# Altium PCB Tigershark 3D R1.1.PcbDoc (part 2 of 3)
Units mil, origin at the board's own origin, x right, y up, seen from the top; angles counter-clockwise.
Board outline 6000 x 4500 mil, 4 copper layers (Top Layer, Groun Plane, Power Plane, Bottom Layer); 257 components, 247 nets, 1024 pads, 791 vias.
Unrouted connection lines stored in the file: 159.
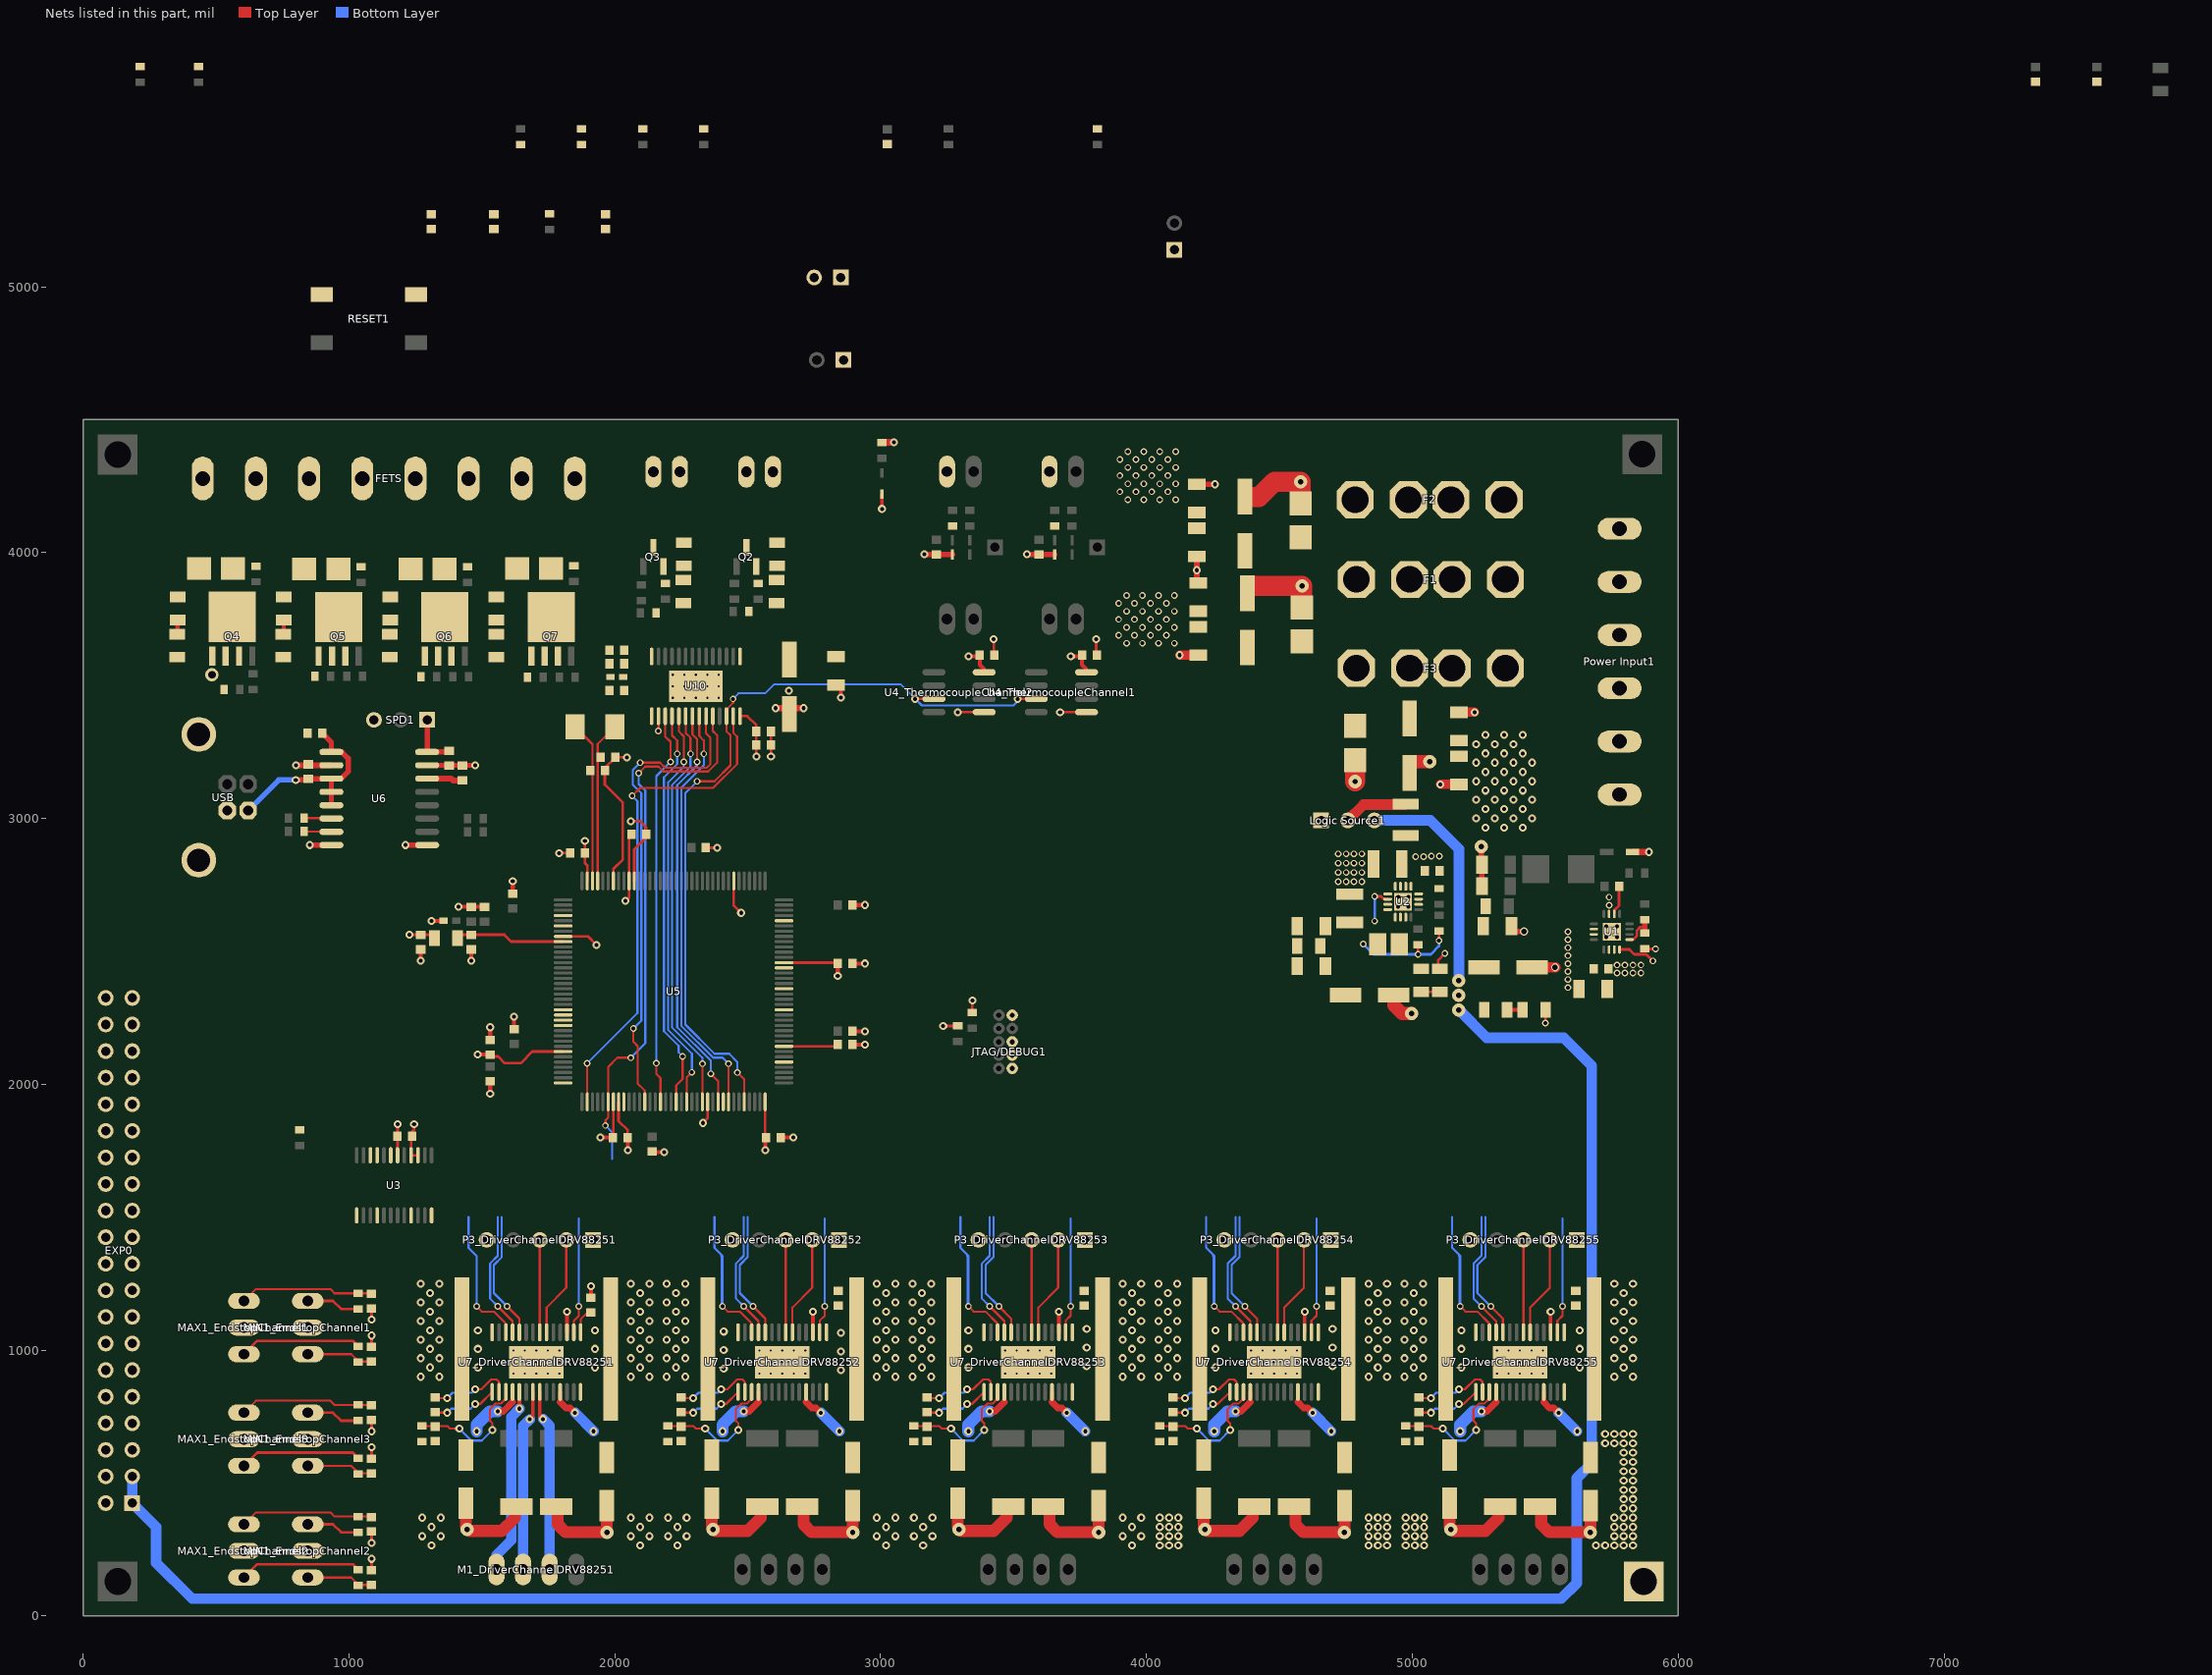
[diagram p4: the nets of this part, all layers, seen from the top]

## Via types
v1: diameter 30, hole 15, Top Layer to Bottom Layer, 501 vias
v2: diameter 25, hole 15, Top Layer to Bottom Layer, 177 vias
v3: diameter 19.68, hole 7.87, Top Layer to Bottom Layer, 90 vias
v4: diameter 50, hole 20, Top Layer to Bottom Layer, 19 vias
v5: diameter 30, hole 20, Top Layer to Bottom Layer, 3 vias
v6: diameter 50, hole 28, Top Layer to Bottom Layer, 1 vias

## Nets (pads, with @x,y where several pads share a name; then routed paths per layer and width w, separated by ;. In a path a pad name is that pad's centre, name@x,y a point inside that pad or via, vN(x,y) a via of type N, cw(c..) or ccw(c..) an arc to the next point about the centre after c; other vN are vias at no path point)
3.3VCC: C13.2 C23.1 C25.2 C26.1 C31_ThermocoupleChannel1.2 C31_ThermocoupleChannel2.2 C35.1 C45.2 C46.2 C47.2 C48.2 C49.2 C50.2 C51.2 C60.2 C61.2 C62.2 C64.2 DBGEN1.1 EXP0.5 EXP0.7 FB3.2 FB5.1 FB9.1 JTAG/DEBUG1.1@3495,2060 MAX1_EndstopChannel1.3 MAX1_EndstopChannel2.3 MAX1_EndstopChannel3.3 MIN1_EndstopChannel1.3 MIN1_EndstopChannel2.3 MIN1_EndstopChannel3.3 P3_DriverChannelDRV88251.1 P3_DriverChannelDRV88252.1 P3_DriverChannelDRV88253.1 P3_DriverChannelDRV88254.1 P3_DriverChannelDRV88255.1 R2_EndstopChannel1.1 R2_EndstopChannel2.1 R2_EndstopChannel3.1 R3_EndstopChannel1.1 R3_EndstopChannel2.1 R3_EndstopChannel3.1 R11.2 R13_ThermistorChannel1.2 R13_ThermistorChannel2.2 R21.2 R24.2 R25.2 R26.2 R27.2 TRST1.1 U3.6 U4_ThermocoupleChannel1.4 U4_ThermocoupleChannel2.4 U5.30 U5.43 U5.72 U5.80 U5.96 U5.134 U5.143 U7_DriverChannelDRV88251.17 U7_DriverChannelDRV88252.17 U7_DriverChannelDRV88253.17 U7_DriverChannelDRV88254.17 U7_DriverChannelDRV88255.17 U10.28 | length 4756.6
  Top Layer w10: MAX1_EndstopChannel2.3@605,145 655,195 1014.05,195 R2_EndstopChannel2.1@1035,174.05 ; MAX1_EndstopChannel3.3@605,565 655,615 1014.05,615 R2_EndstopChannel3.1@1035,594.05 ; MAX1_EndstopChannel1.3@605,985 655,1035 1014.05,1035 R2_EndstopChannel1.1@1035,1014.05 ; MIN1_EndstopChannel2.3@845,345 940,345 970,315 R3_EndstopChannel2.1@1035,315 ; MIN1_EndstopChannel3.3@845,765 940,765 970,735 R3_EndstopChannel3.1@1035,735 ; MIN1_EndstopChannel1.3@845,1185 940,1185 970,1155 R3_EndstopChannel1.1@1035,1155 ; U3.6@1182.8,1733.19 v1(1182.8,1850) ; v1(1227.56,2562.56) C64.2@1270,2562.56 1309.13,2562.56 FB9.1@1321.69,2550 ; C45.2@1526.1,2104.65 1561.1,2104.65 1586.1,2079.65 1646.1,2079.65 1689.72,2123.27 U5.30@1805.75,2123.27 ; v1(1887.56,2915) 1887.56,2832.44 1896.3,2823.7 U5.143@1896.3,2765 ; C48.2@1994.72,1799.65 U5.43@1994.72,1934.29 ; v1(2060,2990) 2095,2990 2117.56,2967.44 C51.2@2117.56,2940 2117.56,2927.56 2073.46,2883.46 U5.134@2073.46,2765 ; U10.28@2471.18,3385 2498.11,3385 2532.28,3350.83 v1(2532.28,3233.27) ; C50.2@2565.59,1799.65 U5.72@2565.59,1934.29 ; U5.80@2636.46,2142.95 2831.85,2142.95 C47.2@2838.54,2149.65 ; U5.96@2636.46,2457.91 C46.2@2831.85,2457.91 ; v1(3235.47,2219.53) R26.2@3290,2219.53 ; R27.2@3345,2269.53 v1(3345,2315)
  Top Layer w14: U7_DriverChannelDRV88251.17@1820,1067.36 v1(1820,1145) ; U7_DriverChannelDRV88252.17@2745,1067.36 v1(2745,1145) ; U7_DriverChannelDRV88253.17@3670,1067.36 v1(3670,1145) ; U7_DriverChannelDRV88254.17@4595,1067.36 v1(4595,1145) ; U7_DriverChannelDRV88255.17@5520,1067.36 v1(5520,1145)
  Top Layer w15: v1(1310,2615) FB5.1@1356.38,2615 ; v1(1483.54,2112.09) C45.2@1531.1,2112.09 ; v1(1945.98,1799.65) C48.2@1993.54,1799.65 ; v1(2565.59,1752.09) C50.2@2565.59,1799.65 ; v1(2838.54,2407.09) C46.2@2838.54,2454.65 ; v1(3330.51,3610) 3372.95,3610 3372.95,3577.56 3389.49,3561.02 U4_ThermocoupleChannel2.4@3389.49,3550 ; v1(3715.51,3610) 3757.95,3610 3757.95,3577.56 3774.49,3561.02 U4_ThermocoupleChannel1.4@3774.49,3550
+5VCC: "Logic Source1.3" C9.1 C34.1 EXP0.1 EXP0.3 FB2.2 R8.2 | length 9199.9
  Bottom Layer w40: EXP0.3@185,525 EXP0.1@185,425 275,335 275,200 410,65 5560,65 5619,124 5619,519 5675,575 5675,2070 5570,2175 5280,2175 v4(5175,2280) ; 4857.45,2992.55 5067.45,2992.55 5175,2885 v4(5175,2390)
  other v4: 5175,2335
+12VCC1: C10.2 C11.2 C16.1 C18.2 C19.2 C66_DriverChannelDRV88251.1 C66_DriverChannelDRV88252.1 C66_DriverChannelDRV88253.1 C66_DriverChannelDRV88254.1 C66_DriverChannelDRV88255.1 C69_DriverChannelDRV88251.1 C69_DriverChannelDRV88252.1 C69_DriverChannelDRV88253.1 C69_DriverChannelDRV88254.1 C69_DriverChannelDRV88255.1 C70_DriverChannelDRV88251.1 C70_DriverChannelDRV88252.1 C70_DriverChannelDRV88253.1 C70_DriverChannelDRV88254.1 C70_DriverChannelDRV88255.1 D8.2 F3.2 R30_DriverChannelDRV88251.1 R30_DriverChannelDRV88252.1 R30_DriverChannelDRV88253.1 R30_DriverChannelDRV88254.1 R30_DriverChannelDRV88255.1 R31.2 U1.2 U1.3 U1.11 U7_DriverChannelDRV88251.4 U7_DriverChannelDRV88251.11 U7_DriverChannelDRV88252.4 U7_DriverChannelDRV88252.11 U7_DriverChannelDRV88253.4 U7_DriverChannelDRV88253.11 U7_DriverChannelDRV88254.4 U7_DriverChannelDRV88254.11 U7_DriverChannelDRV88255.4 U7_DriverChannelDRV88255.11 | length 2214.5
  Top Layer w14: 1615.43,804.43 U7_DriverChannelDRV88251.4@1615.43,842.8 ; 1794.57,804.43 U7_DriverChannelDRV88251.11@1794.57,842.8 ; 2540.43,804.43 U7_DriverChannelDRV88252.4@2540.43,842.8 ; 2719.57,804.43 U7_DriverChannelDRV88252.11@2719.57,842.8 ; 3465.43,804.43 U7_DriverChannelDRV88253.4@3465.43,842.8 ; 3644.57,804.43 U7_DriverChannelDRV88253.11@3644.57,842.8 ; 4390.43,804.43 U7_DriverChannelDRV88254.4@4390.43,842.8 ; 4569.57,804.43 U7_DriverChannelDRV88254.11@4569.57,842.8 ; 5315.43,804.43 U7_DriverChannelDRV88255.4@5315.43,842.8 ; 5494.57,804.43 U7_DriverChannelDRV88255.11@5494.57,842.8
  Top Layer w25: v1(1560,770) 1581,770 1615.43,804.43 ; 1794.57,804.43 1816,783 1832,783 v1(1850,765) ; v1(2485,770) 2506,770 2540.43,804.43 ; 2719.57,804.43 2741,783 2757,783 v1(2775,765) ; v1(3410,770) 3431,770 3465.43,804.43 ; 3644.57,804.43 3666,783 3682,783 v1(3700,765) ; v1(4335,770) 4356,770 4390.43,804.43 ; 4569.57,804.43 4591,783 4607,783 v1(4625,765) ; v1(5260,770) 5281,770 5315.43,804.43 ; 5494.57,804.43 5516,783 5532,783 v1(5550,765)
  Bottom Layer w39: v1(1850,765) v1(1920,695) ; v1(2775,765) v1(2845,695) ; v1(3700,765) v1(3770,695) ; v1(4625,765) v1(4695,695) ; v1(5550,765) v1(5620,695)
  Bottom Layer w45: v1(1480,695) 1480,720 1530,770 v1(1560,770) ; v1(2405,695) 2405,720 2455,770 v1(2485,770) ; v1(3330,695) 3330,720 3380,770 v1(3410,770) ; v1(4255,695) 4255,720 4305,770 v1(4335,770) ; v1(5180,695) 5180,720 5230,770 v1(5260,770)
  other v1: 1310,265 2095,265 2235,265 3020,265 3160,265 3945,265 4050,265 4085,265 4120,265 4835,265 4870,265 4905,265 4975,265 5010,265 5045,265 5690,265 5725,265 5760,265 5795,265 5830,265 1275,300 1345,300 2060,300 2130,300 2200,300 2270,300 2985,300 3055,300 3125,300 3195,300 3910,300 3980,300 4050,300 4085,300 4120,300 4835,300 4870,300 4905,300 4975,300 5010,300 5045,300 5760,300 5795,300 5830,300 1310,335 2095,335 2235,335 3020,335 3160,335 3945,335 4050,335 4085,335 4120,335 4835,335 4870,335 4905,335 4975,335 5010,335 5045,335 5760,335 5795,335 5830,335 1275,370 1345,370 2060,370 2130,370 2200,370 2270,370 2985,370 3055,370 3125,370 3195,370 3910,370 3980,370 4050,370 4085,370 4120,370 4835,370 4870,370 4905,370 4975,370 5010,370 5045,370 5760,370 5795,370 5830,370 5795,405 5830,405 5795,440 5830,440 5795,475 5830,475 5795,510 5830,510 5795,545 5830,545 5795,580 5830,580 5795,615 5830,615 5725,650 5760,650 5795,650 5830,650 5725,685 5760,685 5795,685 5830,685 5275,2965 5345,2965 5415,2965 5240,3000 5310,3000 5380,3000 5450,3000 5275,3035 5345,3035 5415,3035 5240,3070 5310,3070 5380,3070 5450,3070 5275,3105 5345,3105 5415,3105 5240,3140 5310,3140 5380,3140 5450,3140 5275,3175 5345,3175 5415,3175 5240,3210 5310,3210 5380,3210 5450,3210 5275,3245 5345,3245 5415,3245 5240,3280 5310,3280 5380,3280 5275,3315 5345,3315 5415,3315
  other v2: 5770,2419 5800,2419 5830,2419 5860,2419 5770,2449 5800,2449 5830,2449 5860,2449 5740.16,2674 5740,2704
+12VCC2: C3.1 C5.2 C6.2 C27.2 C28.1 D4.2 D15.2 D17.2 D19.2 F2.2 FAN-1.1 FAN-2.1 FETS.3 FETS.5 FETS.7 R1.2 R13.1 R47.1 R60.2 R64.2 R68.2 U10.1 | length 45.2
  Top Layer w8: R1.2@3005,4414.53 R1.2@3005.47,4415
  Top Layer w25: R1.2@3005.47,4415 v1(3050,4415)
  other v2: 3930,4199 3990,4199 4050,4199 4110,4199 3900,4229 3960,4229 4020,4229 4080,4229 3930,4259 3990,4259 4050,4259 4110,4259 3900,4290 3960,4290 4020,4290 4080,4290 3930,4320 3990,4320 4050,4320 4110,4320 3900,4350 3960,4350 4020,4350 4080,4350 3930,4380 3990,4380 4050,4380 4110,4380
+12VCC3: C12.1 C14.2 C15.2 D6.2 D12.2 F1.2 FETS.1 R56.2
  other v2: 3925,3659 3985,3659 4045,3659 4105,3659 3895,3689 3955,3689 4015,3689 4075,3689 3925,3719 3985,3719 4045,3719 4105,3719 3895,3749 3955,3749 4015,3749 4075,3749 3925,3779 3985,3779 4045,3779 4105,3779 3895,3809 3955,3809 4015,3809 4075,3809 3925,3839 3985,3839 4045,3839 4105,3839
ADC_TRIGGER: U5.36
ATSAM_SS: U5.64
AVREF: C65.2 FB9.2 U5.9 | length 413.4
  Top Layer w8: FB9.2@1408.31,2550 FB9.2@1420.87,2562.56
  Top Layer w10: FB9.2@1420.87,2562.56 C65.2@1460,2562.56 1584.45,2562.56 1610.35,2536.65 U5.9@1805.75,2536.65
BED_PWM: U5.52 U10.17 | length 1487.9
  Top Layer w8: v2(2156.1,2079.65) 2156.1,2039.65 2171.89,2023.86 U5.52@2171.89,1934.29 ; U10.17@2189.68,3385 2189.68,3308.43 2209.84,3288.27 v2(2209.84,3213.27)
  Bottom Layer w8: v2(2156.1,2079.65) 2156.1,3159.53 v2(2209.84,3213.27)
BST: C7.2 U1.10 | length 110.4
  Top Layer w10: U1.10@5759.84,2640.93 5759.84,2654.59 5777.56,2672.3 C7.2@5777.56,2744
DIR1: P3_DriverChannelDRV88251.2 U7_DriverChannelDRV88251.20 | length 378.7
  Top Layer w8: U7_DriverChannelDRV88251.20@1743.39,1067.2 1743.39,1160.89 1817.5,1235 1817.5,1414.5 P3_DriverChannelDRV88251.2@1818,1415
DIR2: P3_DriverChannelDRV88252.2 U7_DriverChannelDRV88252.20 | length 378.7
  Top Layer w8: U7_DriverChannelDRV88252.20@2668.39,1067.2 2668.39,1160.89 2742.5,1235 2742.5,1414.5 P3_DriverChannelDRV88252.2@2743,1415
DIR3: P3_DriverChannelDRV88253.2 U7_DriverChannelDRV88253.20 | length 378.7
  Top Layer w8: U7_DriverChannelDRV88253.20@3593.39,1067.2 3593.39,1160.89 3667.5,1235 3667.5,1414.5 P3_DriverChannelDRV88253.2@3668,1415
DIR4: P3_DriverChannelDRV88254.2 U7_DriverChannelDRV88254.20 | length 378.7
  Top Layer w8: U7_DriverChannelDRV88254.20@4518.39,1067.2 4518.39,1160.89 4592.5,1235 4592.5,1414.5 P3_DriverChannelDRV88254.2@4593,1415
DIR5: P3_DriverChannelDRV88255.2 U7_DriverChannelDRV88255.20 | length 378.7
  Top Layer w8: U7_DriverChannelDRV88255.20@5443.39,1067.2 5443.39,1160.89 5517.5,1235 5517.5,1414.5 P3_DriverChannelDRV88255.2@5518,1415
DM_N: R18.1 U6.6 | length 101.4
  Top Layer w10: R18.1@831.53,3001 U6.6@932.88,3001
DP_P: R20.1 U6.7 | length 101.4
  Top Layer w8: R20.1@831.53,2951 U6.7@932.88,2951
DRV_RESET1: U7_DriverChannelDRV88251.16 | length 435.8
  Top Layer w8: U7_DriverChannelDRV88251.16@1845.75,1067.2 1845.75,1110.75 1865,1130 v2(1865,1165)
  Bottom Layer w8: v2(1865,1165) 1865,1495
DRV_RESET2: U7_DriverChannelDRV88252.16 | length 435.8
  Top Layer w8: U7_DriverChannelDRV88252.16@2770.75,1067.2 2770.75,1110.75 2790,1130 v2(2790,1165)
  Bottom Layer w8: v2(2790,1165) 2790,1495
DRV_RESET3: U7_DriverChannelDRV88253.16 | length 640.8
  Top Layer w8: U7_DriverChannelDRV88253.16@3695.75,1067.2 3695.75,1110.75 3715,1130 v2(3715,1165)
  Bottom Layer w8: 3715,1370 v2(3715,1165) 3715,1495
DRV_RESET4: U7_DriverChannelDRV88254.16 | length 435.8
  Top Layer w8: U7_DriverChannelDRV88254.16@4620.75,1067.2 4620.75,1110.75 4640,1130 v2(4640,1165)
  Bottom Layer w8: v2(4640,1165) 4640,1495
DRV_RESET5: U7_DriverChannelDRV88255.16 | length 435.8
  Top Layer w8: U7_DriverChannelDRV88255.16@5545.75,1067.2 5545.75,1110.75 5565,1130 v2(5565,1165)
  Bottom Layer w8: v2(5565,1165) 5565,1495
EN1: P3_DriverChannelDRV88251.3 U7_DriverChannelDRV88251.21 | length 347.9
  Top Layer w8: U7_DriverChannelDRV88251.21@1717.8,1067.2 1718,1067.41 P3_DriverChannelDRV88251.3@1718,1415
EN2: P3_DriverChannelDRV88252.3 U7_DriverChannelDRV88252.21 | length 347.9
  Top Layer w8: U7_DriverChannelDRV88252.21@2642.8,1067.2 2643,1067.41 P3_DriverChannelDRV88252.3@2643,1415
EN3: P3_DriverChannelDRV88253.3 U7_DriverChannelDRV88253.21 | length 347.9
  Top Layer w8: U7_DriverChannelDRV88253.21@3567.8,1067.2 3568,1067.41 P3_DriverChannelDRV88253.3@3568,1415
EN4: P3_DriverChannelDRV88254.3 U7_DriverChannelDRV88254.21 | length 347.9
  Top Layer w8: U7_DriverChannelDRV88254.21@4492.8,1067.2 4493,1067.41 P3_DriverChannelDRV88254.3@4493,1415
EN5: P3_DriverChannelDRV88255.3 U7_DriverChannelDRV88255.21 | length 347.9
  Top Layer w8: U7_DriverChannelDRV88255.21@5417.8,1067.2 5418,1067.41 P3_DriverChannelDRV88255.3@5418,1415
ERASE: U5.87
EXP_CS: U5.45
FB: R7.1 R10.2 U1.5 | length 134.9
  Top Layer w10: U1.5@5816.93,2544.47 5830.59,2544.47 5845,2558.89 5845,2579 5857.74,2591.74 5875,2591.74
  Top Layer w20: R10.2@5875,2569 R7.1@5875,2614.47
FET_CS: U5.49 U10.23 | length 1796.4
  Top Layer w8: v2(2070,2210) 2070,2160 2086.1,2143.9 2086.1,2002.68 2112.83,1975.94 U5.49@2112.83,1934.29 ; v2(2095,3210) 2170,3210 2189.23,3190.77 2345.77,3190.77 2359.84,3204.84 2359.84,3303.27 2343.23,3319.88 U10.23@2343.23,3385
  Bottom Layer w8: v2(2070,2210) 2100,2240 2100,3095 2067.5,3127.5 2067.5,3182.5 v2(2095,3210)
FET_PWM1: U5.65 U10.22 | length 1587.4
  Top Layer w8: U10.22@2317.64,3385 2317.64,3310.47 2334.84,3293.27 v2(2334.84,3243.27) ; U5.65@2427.8,1934.29 v2(2427.8,2077.95)
  Bottom Layer w8: v2(2334.84,3243.27) 2334.84,3199.84 2250,3115 2250,2220.2 2370.2,2100 2405.75,2100 v2(2427.8,2077.95)
FET_PWM2: U5.63 U10.21 | length 1552.6
  Top Layer w8: U10.21@2292.05,3385 2292.05,3316.26 2309.84,3298.47 v2(2309.84,3213.27) ; v2(2361.1,2039.65) 2388.43,2012.32 U5.63@2388.43,1934.29
  Bottom Layer w8: v2(2309.84,3213.27) 2309.84,3199.84 2235,3125 2235,2215 2361.1,2088.9 v2(2361.1,2039.65)
FET_PWM3: U5.60 U10.20 | length 1534.6
  Top Layer w8: U10.20@2266.46,3385 2266.46,3322.06 2284.84,3303.67 v2(2284.84,3243.27) ; U5.60@2329.37,1934.29 v2(2329.37,2077.91)
  Bottom Layer w8: v2(2284.84,3243.27) 2284.84,3195.32 2215,3125.47 2215,2215 2329.37,2100.63 v2(2329.37,2077.91)
FET_PWM4: U5.57 U10.19 | length 1528
  Top Layer w8: U10.19@2240.87,3385 2240.87,3327.85 2259.84,3308.87 v2(2259.84,3213.27) ; U5.57@2270.31,1934.29 2270.31,2025.31 v2(2290,2045)
  Bottom Layer w8: v2(2259.84,3213.27) 2259.84,3194.84 2201,3136 2201,2204 2290,2115 v2(2290,2045)
FET_PWM5: U5.55 U10.18 | length 1518.4
  Top Layer w8: U10.18@2215.28,3385 2215.28,3312.83 2234.84,3293.27 v2(2234.84,3243.27) ; U5.55@2230.94,1934.29 2230.94,1995.94 2255,2020 v2(2255,2105)
  Bottom Layer w8: v2(2234.84,3243.27) 2234.84,3204.84 2185,3155 2185,2200 2240,2145 2240,2120 v2(2255,2105)
FET_RESET: U5.38 U10.27 | length 1867.6
  Top Layer w8: U5.38@1896.3,1934.29 v2(1896.3,2079.45) ; v2(2065,3085) 2095,3115 2369.8,3115 2459.84,3205.04 2459.84,3308.27 2445.59,3322.52 U10.27@2445.59,3385
  Bottom Layer w8: v2(1896.3,2079.45) 2085,2268.15 2085,3065 v2(2065,3085)
GND: "Power Input1.2" "Power Input1.4" "Power Input1.6" C1_EndstopChannel1.2 C1_EndstopChannel2.2 C1_EndstopChannel3.2 C2_EndstopChannel1.2 C2_EndstopChannel2.2 C2_EndstopChannel3.2 C3.2 C4.2 C5.1 C6.1 C8.1 C9.2 C10.1 C11.1 C12.2 C13.1 C14.1 C15.1 C16.2 C17.2 C18.1 C19.1 C20.1 C21.1 C22.2 C23.2 C24.1 C25.1 C26.2 C27.1 C28.2 C29.2 C30_ThermistorChannel1.1 C30_ThermistorChannel2.1 C31_ThermocoupleChannel1.1 C31_ThermocoupleChannel2.1 C32.1 C33.1 C34.2 C35.2 C36.1 C37.1 C38.1 C39.1 C40.1 C41.1 C42.1 C43.1 C44.1 C45.1 C46.1 C47.1 C48.1 C49.1 C50.1 C51.1 C52.2 C54.1 C55.1 C56.1 C57.1 C60.1 C61.1 C62.1 C63.1 C64.1 C65.1 C69_DriverChannelDRV88251.2 C69_DriverChannelDRV88252.2 C69_DriverChannelDRV88253.2 C69_DriverChannelDRV88254.2 C69_DriverChannelDRV88255.2 C70_DriverChannelDRV88251.2 C70_DriverChannelDRV88252.2 C70_DriverChannelDRV88253.2 C70_DriverChannelDRV88254.2 C70_DriverChannelDRV88255.2 C71_DriverChannelDRV88251.1 C71_DriverChannelDRV88252.1 C71_DriverChannelDRV88253.1 C71_DriverChannelDRV88254.1 C71_DriverChannelDRV88255.1 D1.1 D4.1 D5.1 D6.1 D7.1 D8.1 D9.1 D12_ThermistorChannel1.1 D12_ThermistorChannel2.1 EXP0.2 EXP0.4 EXP0.6 EXP0.8 JTAG/DEBUG1.3 JTAG/DEBUG1.5 JTAG/DEBUG1.9 MAX1_EndstopChannel1.2 MAX1_EndstopChannel2.2 MAX1_EndstopChannel3.2 MIN1_EndstopChannel1.2 MIN1_EndstopChannel2.2 MIN1_EndstopChannel3.2 P2_ThermistorChannel1.2 P2_ThermistorChannel2.2 P3_DriverChannelDRV88251.5 P3_DriverChannelDRV88252.5 P3_DriverChannelDRV88253.5 P3_DriverChannelDRV88254.5 P3_DriverChannelDRV88255.5 pad.1 pad.@5870,130 Q2.2 Q3.2 Q4.1 Q4.2 Q4.3 Q5.1 Q5.2 Q5.3 Q6.1 Q6.2 Q6.3 Q7.1 Q7.2 Q7.3 R10.1 R15.2 R28.1 R29.2 R32_DriverChannelDRV88251.1 R32_DriverChannelDRV88252.1 R32_DriverChannelDRV88253.1 R32_DriverChannelDRV88254.1 R32_DriverChannelDRV88255.1 R33_DriverChannelDRV88251.1 R33_DriverChannelDRV88252.1 R33_DriverChannelDRV88253.1 R33_DriverChannelDRV88254.1 R33_DriverChannelDRV88255.1 R38.1 R46.2 R55.2 R59.2 R63.2 R67.2 R71.2 RESET1.2 SPD1.3 U1.4 U1.14 U1.15 U1.17 U2.6 U2.7 U2.8 U2.15 U2.16 U2.17 U3.3 U3.4 U3.9 U3.10 U3.13 U3.16 U3.21 U3.24 U4_ThermocoupleChannel1.1 U4_ThermocoupleChannel2.1 U5.8 U5.44 U5.61 U5.95 U5.104 U5.115 U5.135 U5.138 U6.9 U6.15 U7_DriverChannelDRV88251.14 U7_DriverChannelDRV88251.28 U7_DriverChannelDRV88251.29 U7_DriverChannelDRV88252.14 U7_DriverChannelDRV88252.28 U7_DriverChannelDRV88252.29 U7_DriverChannelDRV88253.14 U7_DriverChannelDRV88253.28 U7_DriverChannelDRV88253.29 U7_DriverChannelDRV88254.14 U7_DriverChannelDRV88254.28 U7_DriverChannelDRV88254.29 U7_DriverChannelDRV88255.14 U7_DriverChannelDRV88255.28 U7_DriverChannelDRV88255.29 U10.16 U10.29 | length 9042.9
  Top Layer w10: C1_EndstopChannel2.2@1085,172.09 v1(1085,215) ; v1(1085,275) C2_EndstopChannel2.2@1085,317.44 ; C1_EndstopChannel3.2@1085,592.09 v1(1085,635) ; v1(1085,695) C2_EndstopChannel3.2@1085,737.44 ; C1_EndstopChannel1.2@1085,1012.09 v1(1085,1055) ; v1(1085,1115) C2_EndstopChannel1.2@1085,1157.44 ; C13.1@1233.98,1801.42 U3.4@1233.98,1733.19 U3.3@1259.57,1733.19 ; C13.1@1233.98,1805 1233.98,1818.98 1245,1830 v1(1245,1850) ; v1(1790,2870) C49.1@1832.44,2870 ; U5.8@1805.75,2556.34 1899.41,2556.34 v1(1931.1,2524.65) ; U5.138@1994.72,2765 1994.72,2809.72 2030,2845 2030,3060 1962.56,3127.44 C44.1@1962.56,3180 1962.56,3190 C43.1@2002.56,3230 v1(2045,3230) ; U5.44@2014.41,1934.29 2014.41,1861.34 2048.66,1827.09 C48.1@2048.66,1799.65 ; v1(2040,2690) 2053.78,2703.78 U5.135@2053.78,2765 2053.78,2931.34 C51.1@2062.44,2940 ; C51.1@2053.78,2940 C51.1@2053.78,2945 ; v2(2164.09,3329.02) U10.16@2164.09,3385 ; v1(2331.1,1854.65) 2349.06,1872.6 U5.61@2349.06,1934.29 ; C37.1@2342.56,2890 v1(2385,2890) ; U5.115@2447.48,2765 2447.48,2672.52 v1(2475,2645) ; v1(2587.4,3233.27) C26.2@2587.4,3327.2 ; v1(3290,3400) U4_ThermocoupleChannel2.1@3389.49,3400 ; C31_ThermocoupleChannel2.1@3425.51,3617.56 v1(3425.51,3675) ; v1(3675,3400) U4_ThermocoupleChannel1.1@3774.49,3400 ; C31_ThermocoupleChannel1.1@3810.51,3617.56 v1(3810.51,3675) ; D9.1@5103.94,2434.21 5097.45,2440.7 5097.45,2467.55 v2(5122.45,2492.55) ; v2@5501.62,2231.62 D7.1@5501.62,2280 ; U1.4@5779.53,2507.07 5816.93,2507.07 5835,2489 5880,2489 v2(5905,2464) ; R10.1@5875.47,2509 v2(5915,2509)
  Top Layer w12: v1(3005,4164.53) D1.1@3005,4220.63
  Top Layer w15: v1(1270,2465) C64.1@1270,2507.44 ; v1(1412.44,2667.56) C54.1@1460,2667.56 C55.1@1510,2667.56 ; v1(1460,2465) C65.1@1460,2507.44 ; v1(1531.1,1964.53) C39.1@1531.1,2012.09 ; C45.1@1531.1,2167.2 v1(1531.1,2214.76) ; C38.1@1616.1,2717.2 v1(1616.1,2764.76) ; C42.1@1621.1,2207.2 v1(1621.1,2254.76) ; C71_DriverChannelDRV88251.1@1910,1197.56 v1@1910,1245.12 ; v1(2048.66,1752.09) C48.1@2048.66,1799.65 ; C41.1@2137.56,1745 v1(2185.12,1745) ; C50.1@2623.66,1799.65 v1(2671.22,1799.65) ; C27.1@2832.28,3502.17 2850,3484.45 v1(2850,3455) ; C47.1@2893.66,2149.65 v1(2941.22,2149.65) ; C36.1@2893.66,2199.65 v1(2941.22,2199.65) ; C46.1@2893.66,2454.65 v1(2941.22,2454.65) ; C40.1@2893.66,2674.65 v1(2941.22,2674.65)
  Top Layer w20: v1(1213,2900) U6.9@1294.12,2900 ; U6.15@1294.12,3200 v1(1475,3200) ; v1(3165,3993.43) D12_ThermistorChannel2.1@3270,3993.43 ; v1(3550,3993.43) D12_ThermistorChannel1.1@3655,3993.43 ; C8.1@5260,2827.85 v4(5260,2895) ; C29.2@5261.85,2745 C8.1@5261.85,2826 ; C34.2@5373.15,2575 v5(5420,2575)
  Top Layer w22: C14.1@4190,3890.81 C6.1@4190,3985.85 ; C5.1@4190,4257.15 v1(4258.15,4257.15)
  Top Layer w25: v1(2605,3415) v1(2710,3415) ; D5.1@5828.23,2874 v1(5890,2874)
  Top Layer w35: v1(4125,3614.51) C15.1@4195,3614.51 ; v1(5105.79,3128.21) C18.1@5175,3128.21 ; C19.1@5175,3399.51 v1@5234.49,3399.51
  Top Layer w40: C9.2@5490,2440 v5(5536.85,2440)
  Top Layer w45: C69_DriverChannelDRV88251.2@1440,414.45 1440,335 1455,320 1575,320 1625,370 R33_DriverChannelDRV88251.1@1625,412.05 ; R32_DriverChannelDRV88251.1@1785,412.05 1785,345 1815,315 v4(1970,315) C70_DriverChannelDRV88251.2@1970,414.45 ; C69_DriverChannelDRV88252.2@2365,414.45 2365,335 2380,320 2500,320 2550,370 R33_DriverChannelDRV88252.1@2550,412.05 ; R32_DriverChannelDRV88252.1@2710,412.05 2710,345 2740,315 v4(2895,315) C70_DriverChannelDRV88252.2@2895,414.45 ; C69_DriverChannelDRV88253.2@3290,414.45 3290,335 3305,320 3425,320 3475,370 R33_DriverChannelDRV88253.1@3475,412.05 ; R32_DriverChannelDRV88253.1@3635,412.05 3635,345 3665,315 v4(3820,315) C70_DriverChannelDRV88253.2@3820,414.45 ; C69_DriverChannelDRV88254.2@4215,414.45 4215,335 4230,320 4350,320 4400,370 R33_DriverChannelDRV88254.1@4400,412.05 ; R32_DriverChannelDRV88254.1@4560,412.05 4560,345 4590,315 v4(4745,315) C70_DriverChannelDRV88254.2@4745,414.45 ; C69_DriverChannelDRV88255.2@5140,414.45 5140,335 5155,320 5275,320 5325,370 R33_DriverChannelDRV88255.1@5325,412.05 ; R32_DriverChannelDRV88255.1@5485,412.05 5485,345 5515,315 v4(5670,315) C70_DriverChannelDRV88255.2@5670,414.45
  Top Layer w50: C23.2@4930,2335 4930,2298.18 4962.45,2265.73 v4(4997.45,2265.73) ; C16.2@4990,3171.64 4990,3194 5010,3214 v4(5065,3214)
  Top Layer w75: C3.2@4385,4209 4423.5,4209 4480.86,4266.36 v4(4580,4266.36) D4.1@4580,4185.34 ; 4407.64,3875.02 v4(4585,3875.02) D6.1@4585,3794 ; v4(4785,3139) D8.1@4785,3220.02
  other v1: 1270,900 1340,900 2060,900 2130,900 2195,900 2265,900 2985,900 3055,900 3120,900 3190,900 3910,900 3980,900 4045,900 4115,900 4835,900 4905,900 4970,900 5040,900 5760,900 5830,900 2850,925 2410,930 1305,935 1485,935 1925,935 2095,935 2230,935 3020,935 3155,935 3330,935 3945,935 4080,935 4260,935 4870,935 5005,935 5185,935 5630,935 5795,935 3775,940 4700,940 1270,970 1340,970 2060,970 2130,970 2195,970 2265,970 2985,970 3055,970 3120,970 3190,970 3910,970 3980,970 4045,970 4115,970 4835,970 4905,970 4970,970 5040,970 5760,970 5830,970 2850,995 2410,1000 1305,1005 1485,1005 1925,1005 2095,1005 2230,1005 3020,1005 3155,1005 3330,1005 3945,1005 4080,1005 4260,1005 4870,1005 5005,1005 5185,1005 5630,1005 5795,1005 3775,1010 4700,1010 1270,1040 1340,1040 2060,1040 2130,1040 2195,1040 2265,1040 2985,1040 3055,1040 3120,1040 3190,1040 3910,1040 3980,1040 4045,1040 4115,1040 4835,1040 4905,1040 4970,1040 5040,1040 5760,1040 5830,1040 2850,1065 2410,1070 1305,1075 1485,1075 1925,1075 2095,1075 2230,1075 3020,1075 3155,1075 3330,1075 3945,1075 4080,1075 4260,1075 4870,1075 5005,1075 5185,1075 5630,1075 5795,1075 3775,1080 4700,1080 1270,1110 1340,1110 2060,1110 2130,1110 2195,1110 2265,1110 2985,1110 3055,1110 3120,1110 3190,1110 3910,1110 3980,1110 4045,1110 4115,1110 4835,1110 4905,1110 4970,1110 5040,1110 5760,1110 5830,1110 1305,1145 2095,1145 2230,1145 3020,1145 3155,1145 3945,1145 4080,1145 4870,1145 5005,1145 5795,1145 1270,1180 1340,1180 2060,1180 2130,1180 2195,1180 2265,1180 2985,1180 3055,1180 3120,1180 3190,1180 3910,1180 3980,1180 4045,1180 4115,1180 4835,1180 4905,1180 4970,1180 5040,1180 5760,1180 5830,1180 1305,1215 2095,1215 2230,1215 3020,1215 3155,1215 3945,1215 4080,1215 4870,1215 5005,1215 5795,1215 1910,1240 1270,1250 1340,1250 2060,1250 2130,1250 2195,1250 2265,1250 2985,1250 3055,1250 3120,1250 3190,1250 3910,1250 3980,1250 4045,1250 4115,1250 4835,1250 4905,1250 4970,1250 5040,1250 5760,1250 5830,1250 5235,3399 2655,3480 4190,3934
  other v2: 5500,2230.01 5585,2364 5585,2394 5585,2424 5585,2454 5585,2484 5585,2514 5585,2544 5730,2554 5770,2554 5585,2574 5730,2594 5770,2594 4946.45,2667.82 4984.45,2667.82 4947.45,2704.82 4984.45,2705.82 4721.45,2761.82 4751.45,2761.82 4780.45,2761.82 4810.45,2761.82 4721.45,2796.82 4751.45,2796.82 4780.45,2796.82 4810.45,2796.82 4721.45,2831.82 4751.45,2831.82 4780.45,2831.82 4810.45,2831.82 5012.45,2856.82 5042.45,2856.82 5071.45,2857.82 5101.45,2857.82 4721.45,2866.82 4751.45,2866.82 4780.45,2866.82 4810.45,2866.82
  other v3: 1618.39,911.69 1661.69,911.69 1705,911.69 1748.31,911.69 1791.61,911.69 2543.39,911.69 2586.69,911.69 2630,911.69 2673.31,911.69 2716.61,911.69 3468.39,911.69 3511.69,911.69 3555,911.69 3598.31,911.69 3641.61,911.69 4393.39,911.69 4436.69,911.69 4480,911.69 4523.31,911.69 4566.61,911.69 5318.39,911.69 5361.69,911.69 5405,911.69 5448.31,911.69 5491.61,911.69 1618.39,955 1661.69,955 1705,955 1748.31,955 1791.61,955 2543.39,955 2586.69,955 2630,955 2673.31,955 2716.61,955 3468.39,955 3511.69,955 3555,955 3598.31,955 3641.61,955 4393.39,955 4436.69,955 4480,955 4523.31,955 4566.61,955 5318.39,955 5361.69,955 5405,955 5448.31,955 5491.61,955 1618.39,998.31 1661.69,998.31 1705,998.31 1748.31,998.31 1791.61,998.31 2543.39,998.31 2586.69,998.31 2630,998.31 2673.31,998.31 2716.61,998.31 3468.39,998.31 3511.69,998.31 3555,998.31 3598.31,998.31 3641.61,998.31 4393.39,998.31 4436.69,998.31 4480,998.31 4523.31,998.31 4566.61,998.31 5318.39,998.31 5361.69,998.31 5405,998.31 5448.31,998.31 5491.61,998.31 2218.23,3453.9 2261.54,3453.9 2304.84,3453.9 2348.15,3453.9 2391.46,3453.9 2218.23,3497.2 2261.54,3497.2 2304.84,3497.2 2348.15,3497.2 2391.46,3497.2 2218.23,3540.51 2261.54,3540.51 2304.84,3540.51 2348.15,3540.51 2391.46,3540.51
  other v4: 1445,325 2370,325 3295,325 4220,325 5145,325
  other v6: 485,3540
I2C_SCL: U5.77
I2C_SDA: U5.91
INPUT_GND: C58.1 C59.1 U6.2 U6.8 USB.4 USB.5 USB.6 | length 214
  Top Layer w20: v1(852.76,2900) U6.8@933.88,2900
  Top Layer w22: v1(801,3200) U6.2@933.88,3200
KRESET: kRESET.1
MAX_ES1: C2_EndstopChannel1.1 MAX1_EndstopChannel1.1 R3_EndstopChannel1.2 U5.24 | length 505.9
  Top Layer w8: MAX1_EndstopChannel1.1@605,1185 650,1230 930,1230 945.94,1214.06 R3_EndstopChannel1.2@1035,1214.06 1083.5,1214.06 C2_EndstopChannel1.1@1085,1212.56
MAX_ES2: C2_EndstopChannel2.1 MAX1_EndstopChannel2.1 R3_EndstopChannel2.2 U5.22 | length 505.9
  Top Layer w8: MAX1_EndstopChannel2.1@605,345 650,390 930,390 945.94,374.05 R3_EndstopChannel2.2@1035,374.05 1083.5,374.05 C2_EndstopChannel2.1@1085,372.56
MAX_ES3: C2_EndstopChannel3.1 MAX1_EndstopChannel3.1 R3_EndstopChannel3.2 U5.4 | length 505.9
  Top Layer w8: MAX1_EndstopChannel3.1@605,765 650,810 930,810 945.94,794.06 R3_EndstopChannel3.2@1035,794.06 1083.5,794.06 C2_EndstopChannel3.1@1085,792.56
MIN_ES1: C1_EndstopChannel1.1 MIN1_EndstopChannel1.1 R2_EndstopChannel1.2 U5.25 | length 251.6
  Top Layer w8: MIN1_EndstopChannel1.1@845,985 1008.94,985 1036.97,956.97 C1_EndstopChannel1.1@1085,956.97
MIN_ES2: C1_EndstopChannel2.1 MIN1_EndstopChannel2.1 R2_EndstopChannel2.2 U5.23 | length 251.6
  Top Layer w8: MIN1_EndstopChannel2.1@845,145 1008.94,145 1036.97,116.97 C1_EndstopChannel2.1@1085,116.97
MIN_ES3: C1_EndstopChannel3.1 MIN1_EndstopChannel3.1 R2_EndstopChannel3.2 U5.6 | length 251.6
  Top Layer w8: MIN1_EndstopChannel3.1@845,565 1008.94,565 1036.97,536.97 C1_EndstopChannel3.1@1085,536.97
MISO: U4_ThermocoupleChannel1.7 U4_ThermocoupleChannel2.7 U5.68 U10.26 | length 3048
  Top Layer w8: v2(2310,3140) 2375,3140 2434.84,3199.84 2434.84,3313.27 2420,3328.11 U10.26@2420,3385 2420,3410 2445,3435 v2(2445,3450) ; v2(2461.1,2044.65) 2486.85,2018.9 U5.68@2486.85,1934.29 ; v1(3130,3450) U4_ThermocoupleChannel2.7@3200.51,3450 ; v1(3515,3450) U4_ThermocoupleChannel1.7@3585.51,3450
  Bottom Layer w8: v2(2310,3140) 2265,3095 2265,2225 2375,2115 2430.2,2115 2461.1,2084.1 v2(2461.1,2044.65) ; v2(2445,3450) 2465.84,3470.84 2565.84,3470.84 2600,3505 3075,3505 v1(3130,3450) 3155,3425 3500,3425 3515,3440 v1(3515,3450)
MOD0E1: U7_DriverChannelDRV88251.24 | length 485
  Top Layer w8: v2(1595,1165) 1641.02,1118.98 U7_DriverChannelDRV88251.24@1641.02,1067.2
  Bottom Layer w8: 1575,1500 1575,1350 1545,1320 1545,1215 v2(1595,1165)
MOD0E2: U7_DriverChannelDRV88252.24 | length 485
  Top Layer w8: v2(2520,1165) 2566.02,1118.98 U7_DriverChannelDRV88252.24@2566.02,1067.2
  Bottom Layer w8: 2500,1500 2500,1350 2470,1320 2470,1215 v2(2520,1165)
MOD0E3: U7_DriverChannelDRV88253.24 | length 485
  Top Layer w8: v2(3445,1165) 3491.02,1118.98 U7_DriverChannelDRV88253.24@3491.02,1067.2
  Bottom Layer w8: 3425,1500 3425,1350 3395,1320 3395,1215 v2(3445,1165)
MOD0E4: U7_DriverChannelDRV88254.24 | length 485
  Top Layer w8: v2(4370,1165) 4416.02,1118.98 U7_DriverChannelDRV88254.24@4416.02,1067.2
  Bottom Layer w8: 4350,1500 4350,1350 4320,1320 4320,1215 v2(4370,1165)
MOD0E5: U7_DriverChannelDRV88255.24 | length 485
  Top Layer w8: v2(5295,1165) 5341.02,1118.98 U7_DriverChannelDRV88255.24@5341.02,1067.2
  Bottom Layer w8: 5275,1500 5275,1350 5245,1320 5245,1215 v2(5295,1165)
MOD1E1: U7_DriverChannelDRV88251.25 | length 479.8
  Top Layer w8: v2(1560,1165) 1615.43,1109.57 U7_DriverChannelDRV88251.25@1615.43,1067.2
  Bottom Layer w8: v2(1560,1165) 1531,1194 1531,1326 1560,1355 1560,1500
MOD1E2: U7_DriverChannelDRV88252.25 | length 479.8
  Top Layer w8: v2(2485,1165) 2540.43,1109.57 U7_DriverChannelDRV88252.25@2540.43,1067.2
  Bottom Layer w8: v2(2485,1165) 2456,1194 2456,1326 2485,1355 2485,1500
MOD1E3: U7_DriverChannelDRV88253.25 | length 479.8
  Top Layer w8: v2(3410,1165) 3465.43,1109.57 U7_DriverChannelDRV88253.25@3465.43,1067.2
  Bottom Layer w8: v2(3410,1165) 3381,1194 3381,1326 3410,1355 3410,1500
MOD1E4: U7_DriverChannelDRV88254.25 | length 479.8
  Top Layer w8: v2(4335,1165) 4390.43,1109.57 U7_DriverChannelDRV88254.25@4390.43,1067.2
  Bottom Layer w8: v2(4335,1165) 4306,1194 4306,1326 4335,1355 4335,1500
MOD1E5: U7_DriverChannelDRV88255.25 | length 479.8
  Top Layer w8: v2(5260,1165) 5315.43,1109.57 U7_DriverChannelDRV88255.25@5315.43,1067.2
  Bottom Layer w8: v2(5260,1165) 5231,1194 5231,1326 5260,1355 5260,1500
MOD2E1: U7_DriverChannelDRV88251.26 | length 484.1
  Top Layer w8: v2(1480,1165) 1500,1145 1545,1145 U7_DriverChannelDRV88251.26@1589.84,1100.16
  Bottom Layer w8: 1450,1500 1450,1385 1480,1355 v2(1480,1165)
MOD2E2: U7_DriverChannelDRV88252.26 | length 673.3
  Top Layer w8: v2(2405,1165) 2425,1145 2470,1145 U7_DriverChannelDRV88252.26@2514.84,1100.16
  Bottom Layer w8: 2375,1500 2375,1385 2405,1355 v2(2405,1165) ; 2400,1355 2402.97,1352.03 v2@2402.97,1167.03
MOD2E3: U7_DriverChannelDRV88253.26 | length 862.5
  Top Layer w8: v2(3330,1165) 3350,1145 3395,1145 U7_DriverChannelDRV88253.26@3439.84,1100.16
  Bottom Layer w8: 3300,1500 3300,1385 3330,1355 v2(3330,1165) ; 3327.97,1352.03 3325,1355 3327.97,1352.03 ; 3327.97,1352.03 3327.97,1167.03 3327.97,1352.03
MOD2E4: U7_DriverChannelDRV88254.26 | length 862.5
  Top Layer w8: v2(4255,1165) 4275,1145 4320,1145 U7_DriverChannelDRV88254.26@4364.84,1100.16
  Bottom Layer w8: 4225,1500 4225,1385 4255,1355 v2(4255,1165) ; 4252.97,1352.03 4250,1355 4252.97,1352.03 ; 4252.97,1352.03 4252.97,1167.03 4252.97,1352.03
MOD2E5: U7_DriverChannelDRV88255.26 | length 862.5
  Top Layer w8: v2(5180,1165) 5200,1145 5245,1145 U7_DriverChannelDRV88255.26@5289.84,1100.16
  Bottom Layer w8: 5150,1500 5150,1385 5180,1355 v2(5180,1165) ; 5177.97,1352.03 5175,1355 5177.97,1352.03 ; 5177.97,1352.03 5177.97,1167.03 5177.97,1352.03
MOSI: U3.7 U5.42 U10.24 | length 2104.9
  Top Layer w8: U3.7@1157.2,1733.19 U3.7@1157.2,1762.8 ; v2@1965,1840 v2(1965,1845) 1965,1865 1975.04,1875.04 U5.42@1975.04,1934.29 1975.04,2065.04 2010,2100 v2(2060,2100) ; v2(2090,3170) 2115,3195 2165,3195 2183.23,3176.77 2351.57,3176.77 2384.84,3210.04 2384.84,3313.27 2368.82,3329.29 U10.24@2368.82,3385
  Bottom Layer w8: v2(1965,1845) 1990,1820 1990,1720 ; v2(2060,2100) 2115,2155 2115,3105 2090,3130 v2(2090,3170)
NetC4_1: C4.1 C52.1 FB3.1 L2.2 R12.2 R37.2 U2.14 | length 554.1
  Top Layer w10: v2(4858.45,2706.82) 4882.33,2706.82 4892.49,2696.66 U2.14@4907.38,2696.66 ; v2(5021.45,2488.82) R12.2@5021.45,2525.29 ; v2(5100.45,2540.82) R37.2@5100.45,2577.29
  Bottom Layer w10: v2(4815.45,2527.82) 4854.45,2488.82 v2(5021.45,2488.82) 5069.45,2488.82 5100.45,2519.82 v2(5100.45,2540.82) ; v2(4858.45,2613.82) v2(4858.45,2706.82)
NetC17_1: C17.1 C20.2 FB1.1 U10.14
NetC21_2: C21.2 FB1.2 U10.15
NetC22_1: C22.1 F4.1 U2.10 U2.11 U2.12 U2.13
NetC24_2: C24.2 U2.9
NetC43_2: C43.2 U5.141 X2.1 | length 606.6
  Top Layer w8: U5.141@1935.67,2765 1935.67,3280.67 X2.1@2000,3345
NetC44_2: C44.2 U5.142 X2.2 | length 607.2
  Top Layer w8: X2.2@1850.39,3345 1915.98,3279.41 U5.142@1915.98,2765
NetC56_2: "Logic Source1.1" C56.2 U6.14 | length 135.6
  Top Layer w22: U6.14@1294.12,3150 1385,3150 1391.56,3143.44 C56.2@1427,3143.44
NetC57_2: C57.2 R16.2 SPD1.1 U6.16 | length 205.2
  Top Layer w10: C57.2@1373.44,3250 C57.2@1377,3253.56
  Top Layer w20: SPD1.1@1294.12,3370.88 U6.16@1294.12,3250 C57.2@1373.44,3250
NetC58_2: C58.2 C59.2 U6.1 U6.3 U6.4 U6.5 USB.1 | length 739.9
  Top Layer w20: v1(800,3145) C58.2@843.56,3145 ; C58.2@847,3148.44 932.32,3148.44 U6.3@933.88,3150 ; C59.2@899.56,3321 933.88,3286.68 U6.1@933.88,3250 973,3250 997,3226 997,3176 971,3150 U6.3@933.88,3150 ; U6.5@933.88,3050 U6.4@933.88,3100 U6.3@933.88,3150
  Bottom Layer w20: USB.1@621,3030 736,3145 v1(800,3145)
NetC66_DriverChannelDRV88251_2: C66_DriverChannelDRV88251.2 R30_DriverChannelDRV88251.2 U7_DriverChannelDRV88251.3 | length 487.8
  Top Layer w8: R30_DriverChannelDRV88251.2@1275,714.53 1370.47,714.53 1380,705 v1(1415,705) ; v1(1540,700) 1540,725 1530,735 1530,778.44 1550.56,799 1570.92,799 1589.84,817.93 U7_DriverChannelDRV88251.3@1589.84,842.8
  Bottom Layer w8: v1(1415,705) 1460,660 1500,660 v1(1540,700)
NetC66_DriverChannelDRV88252_2: C66_DriverChannelDRV88252.2 R30_DriverChannelDRV88252.2 U7_DriverChannelDRV88252.3 | length 487.8
  Top Layer w8: R30_DriverChannelDRV88252.2@2200,714.53 2295.47,714.53 2305,705 v1(2340,705) ; v1(2465,700) 2465,725 2455,735 2455,778.44 2475.56,799 2495.92,799 2514.84,817.93 U7_DriverChannelDRV88252.3@2514.84,842.8
  Bottom Layer w8: v1(2340,705) 2385,660 2425,660 v1(2465,700)
NetC66_DriverChannelDRV88253_2: C66_DriverChannelDRV88253.2 R30_DriverChannelDRV88253.2 U7_DriverChannelDRV88253.3 | length 487.8
  Top Layer w8: R30_DriverChannelDRV88253.2@3125,714.53 3220.47,714.53 3230,705 v1(3265,705) ; v1(3390,700) 3390,725 3380,735 3380,778.44 3400.56,799 3420.92,799 3439.84,817.93 U7_DriverChannelDRV88253.3@3439.84,842.8
  Bottom Layer w8: v1(3265,705) 3310,660 3350,660 v1(3390,700)
NetC66_DriverChannelDRV88254_2: C66_DriverChannelDRV88254.2 R30_DriverChannelDRV88254.2 U7_DriverChannelDRV88254.3 | length 487.8
  Top Layer w8: R30_DriverChannelDRV88254.2@4050,714.53 4145.47,714.53 4155,705 v1(4190,705) ; v1(4315,700) 4315,725 4305,735 4305,778.44 4325.56,799 4345.92,799 4364.84,817.93 U7_DriverChannelDRV88254.3@4364.84,842.8
  Bottom Layer w8: v1(4190,705) 4235,660 4275,660 v1(4315,700)
NetC66_DriverChannelDRV88255_2: C66_DriverChannelDRV88255.2 R30_DriverChannelDRV88255.2 U7_DriverChannelDRV88255.3 | length 487.8
  Top Layer w8: R30_DriverChannelDRV88255.2@4975,714.53 5070.47,714.53 5080,705 v1(5115,705) ; v1(5240,700) 5240,725 5230,735 5230,778.44 5250.56,799 5270.92,799 5289.84,817.93 U7_DriverChannelDRV88255.3@5289.84,842.8
  Bottom Layer w8: v1(5115,705) 5160,660 5200,660 v1(5240,700)
NetC68_DriverChannelDRV88251_1: C68_DriverChannelDRV88251.1 U7_DriverChannelDRV88251.1 | length 246.9
  Top Layer w8: C68_DriverChannelDRV88251.1@1325,767.44 1327.44,765 v1(1370,765) ; v1(1475,797.44) 1493.31,797.44 U7_DriverChannelDRV88251.1@1538.66,842.8
  Bottom Layer w8: v1(1370,765) 1385,780 1457.56,780 v1(1475,797.44)
NetC68_DriverChannelDRV88251_2: C68_DriverChannelDRV88251.2 U7_DriverChannelDRV88251.2 | length 311.1
  Top Layer w8: C68_DriverChannelDRV88251.2@1325,822.56 1327.56,820 v1(1370,820) ; v1(1475,852.56) 1497.56,852.56 1535,890 1555,890 1564.25,880.75 U7_DriverChannelDRV88251.2@1564.25,842.8
  Bottom Layer w8: v1(1370,820) 1390,840 1462.44,840 v1(1475,852.56)
NetC68_DriverChannelDRV88252_1: C68_DriverChannelDRV88252.1 U7_DriverChannelDRV88252.1 | length 246.9
  Top Layer w8: C68_DriverChannelDRV88252.1@2250,767.44 2252.44,765 v1(2295,765) ; v1(2400,797.44) 2418.31,797.44 U7_DriverChannelDRV88252.1@2463.66,842.8
  Bottom Layer w8: v1(2295,765) 2310,780 2382.56,780 v1(2400,797.44)
NetC68_DriverChannelDRV88252_2: C68_DriverChannelDRV88252.2 U7_DriverChannelDRV88252.2 | length 311.1
  Top Layer w8: C68_DriverChannelDRV88252.2@2250,822.56 2252.56,820 v1(2295,820) ; v1(2400,852.56) 2422.56,852.56 2460,890 2480,890 2489.25,880.75 U7_DriverChannelDRV88252.2@2489.25,842.8
  Bottom Layer w8: v1(2295,820) 2315,840 2387.44,840 v1(2400,852.56)
NetC68_DriverChannelDRV88253_1: C68_DriverChannelDRV88253.1 U7_DriverChannelDRV88253.1 | length 246.9
  Top Layer w8: C68_DriverChannelDRV88253.1@3175,767.44 3177.44,765 v1(3220,765) ; v1(3325,797.44) 3343.31,797.44 U7_DriverChannelDRV88253.1@3388.66,842.8
  Bottom Layer w8: v1(3220,765) 3235,780 3307.56,780 v1(3325,797.44)
NetC68_DriverChannelDRV88253_2: C68_DriverChannelDRV88253.2 U7_DriverChannelDRV88253.2 | length 311.1
  Top Layer w8: C68_DriverChannelDRV88253.2@3175,822.56 3177.56,820 v1(3220,820) ; v1(3325,852.56) 3347.56,852.56 3385,890 3405,890 3414.25,880.75 U7_DriverChannelDRV88253.2@3414.25,842.8
  Bottom Layer w8: v1(3220,820) 3240,840 3312.44,840 v1(3325,852.56)
NetC68_DriverChannelDRV88254_1: C68_DriverChannelDRV88254.1 U7_DriverChannelDRV88254.1 | length 246.9
  Top Layer w8: C68_DriverChannelDRV88254.1@4100,767.44 4102.44,765 v1(4145,765) ; v1(4250,797.44) 4268.31,797.44 U7_DriverChannelDRV88254.1@4313.66,842.8
  Bottom Layer w8: v1(4145,765) 4160,780 4232.56,780 v1(4250,797.44)
NetC68_DriverChannelDRV88254_2: C68_DriverChannelDRV88254.2 U7_DriverChannelDRV88254.2 | length 311.1
  Top Layer w8: C68_DriverChannelDRV88254.2@4100,822.56 4102.56,820 v1(4145,820) ; v1(4250,852.56) 4272.56,852.56 4310,890 4330,890 4339.25,880.75 U7_DriverChannelDRV88254.2@4339.25,842.8
  Bottom Layer w8: v1(4145,820) 4165,840 4237.44,840 v1(4250,852.56)
NetC68_DriverChannelDRV88255_1: C68_DriverChannelDRV88255.1 U7_DriverChannelDRV88255.1 | length 246.9
  Top Layer w8: C68_DriverChannelDRV88255.1@5025,767.44 5027.44,765 v1(5070,765) ; v1(5175,797.44) 5193.31,797.44 U7_DriverChannelDRV88255.1@5238.66,842.8
  Bottom Layer w8: v1(5070,765) 5085,780 5157.56,780 v1(5175,797.44)
NetC68_DriverChannelDRV88255_2: C68_DriverChannelDRV88255.2 U7_DriverChannelDRV88255.2 | length 311.1
  Top Layer w8: C68_DriverChannelDRV88255.2@5025,822.56 5027.56,820 v1(5070,820) ; v1(5175,852.56) 5197.56,852.56 5235,890 5255,890 5264.25,880.75 U7_DriverChannelDRV88255.2@5264.25,842.8
  Bottom Layer w8: v1(5070,820) 5090,840 5162.44,840 v1(5175,852.56)
NetC71_DriverChannelDRV88251_2: C71_DriverChannelDRV88251.2 U7_DriverChannelDRV88251.15 | length 98.6
  Top Layer w8: U7_DriverChannelDRV88251.15@1871.34,1067.2 1871.34,1116.34 1897.44,1142.44 C71_DriverChannelDRV88251.2@1910,1142.44
NetC71_DriverChannelDRV88252_2: C71_DriverChannelDRV88252.2 U7_DriverChannelDRV88252.15
NetC71_DriverChannelDRV88253_2: C71_DriverChannelDRV88253.2 U7_DriverChannelDRV88253.15
NetC71_DriverChannelDRV88254_2: C71_DriverChannelDRV88254.2 U7_DriverChannelDRV88254.15
NetC71_DriverChannelDRV88255_2: C71_DriverChannelDRV88255.2 U7_DriverChannelDRV88255.15
NetD7_2: D7.2 R8.1 | length 58.5
  Top Layer w15: R8.1@5356.54,2280 D7.2@5415,2280
NetD9_2: D9.2 R11.1 | length 70.5
  Top Layer w10: R11.1@5033.45,2347.51 5103.87,2347.51 D9.2@5103.94,2347.59
NetD10_1: D10.1 FAN-1.2 Q2.3 R14.2
NetD10_2: D10.2 R13.2
NetD11_1: D11.1 FAN-2.2 Q3.3
NetD11_2: D11.2 R47.2 R48.2
NetD12_1: D12.1 D13.1 FETS.2 Q4.5 R57.2
NetD13_2: D13.2 R56.1 | length 54.1
  Top Layer w8: D13.2@353.5,3693.23 D13.2@355,3694.72
  Top Layer w15: D13.2@355,3694.72 R56.1@355,3746.69
NetD14_1: D14.1 D15.1 FETS.4 Q5.5 R61.2
NetD14_2: D14.2 R60.1 | length 52
  Top Layer w15: D14.2@755,3694.72 R60.1@755,3746.69
NetD16_1: D16.1 D17.1 FETS.6 Q6.5 R65.2
NetD16_2: D16.2 R64.1
NetD18_1: D18.1 D19.1 FETS.8 Q7.5 R69.2
NetD18_2: D18.2 R68.1
NetDBGEN1_2: DBGEN1.2 R22.2 R29.1
NetEXP0_9: EXP0.9
NetEXP0_10: EXP0.10
NetEXP0_11: EXP0.11
NetEXP0_12: EXP0.12
NetEXP0_13: EXP0.13
NetEXP0_14: EXP0.14
NetEXP0_15: EXP0.15
NetEXP0_16: EXP0.16
NetEXP0_17: EXP0.17
NetEXP0_18: EXP0.18
NetEXP0_19: EXP0.19
NetEXP0_20: EXP0.20
NetEXP0_21: EXP0.21
NetEXP0_22: EXP0.22
NetEXP0_23: EXP0.23
NetEXP0_24: EXP0.24
NetEXP0_25: EXP0.25
NetEXP0_26: EXP0.26
NetEXP0_27: EXP0.27
NetEXP0_28: EXP0.28
NetEXP0_29: EXP0.29
NetEXP0_30: EXP0.30
NetEXP0_31: EXP0.31
NetEXP0_32: EXP0.32
NetEXP0_33: EXP0.33
NetEXP0_34: EXP0.34
NetEXP0_35: EXP0.35
NetEXP0_36: EXP0.36
NetEXP0_37: EXP0.37
NetEXP0_38: EXP0.38
NetEXP0_39: EXP0.39
NetEXP0_40: EXP0.40
NetF1_1: "Power Input1.3" F1.1
NetF2_1: "Power Input1.1" F2.1
NetF3_1: "Power Input1.5" F3.1
NetF4_2: "Logic Source1.2" F4.2 | length 239.5
  Top Layer w40: 4757.45,2992.55 4816.5,3051.61 F4.2@4972.45,3051.61
NetL2_1: L2.1 U2.1 U2.2 U2.3
NetM1_DriverChannelDRV88251_1: M1_DriverChannelDRV88251.1 U7_DriverChannelDRV88251.5 | length 703.4
  Top Layer w14: v1(1641.02,780) U7_DriverChannelDRV88251.5@1641.02,842.8
  Bottom Layer w39: M1_DriverChannelDRV88251.1@1555,175 1555,230 1610,285 1610,748.98 v1(1641.02,780)
NetM1_DriverChannelDRV88251_2: M1_DriverChannelDRV88251.2 U7_DriverChannelDRV88251.7 | length 683.2
  Top Layer w14: v1(1680,740) 1692.2,752.2 U7_DriverChannelDRV88251.7@1692.2,842.8
  Bottom Layer w39: M1_DriverChannelDRV88251.2@1655,175 1655,715 v1(1680,740)
NetM1_DriverChannelDRV88251_3: M1_DriverChannelDRV88251.3 U7_DriverChannelDRV88251.8 | length 665.9
  Top Layer w14: 1717.8,753.23 U7_DriverChannelDRV88251.8@1717.8,842.8
  Bottom Layer w39: v1(1730,741.02) 1755,716.02 M1_DriverChannelDRV88251.3@1755,175